# Altium PCB IMU_ATM_Module.PcbDoc
Units mm, origin at the board's own origin, x right, y up, seen from the top; angles counter-clockwise.
Board outline 30 x 25 mm, 2 copper layers (Top Layer, Bottom Layer); 41 components, 22 nets, 136 pads, 72 vias.
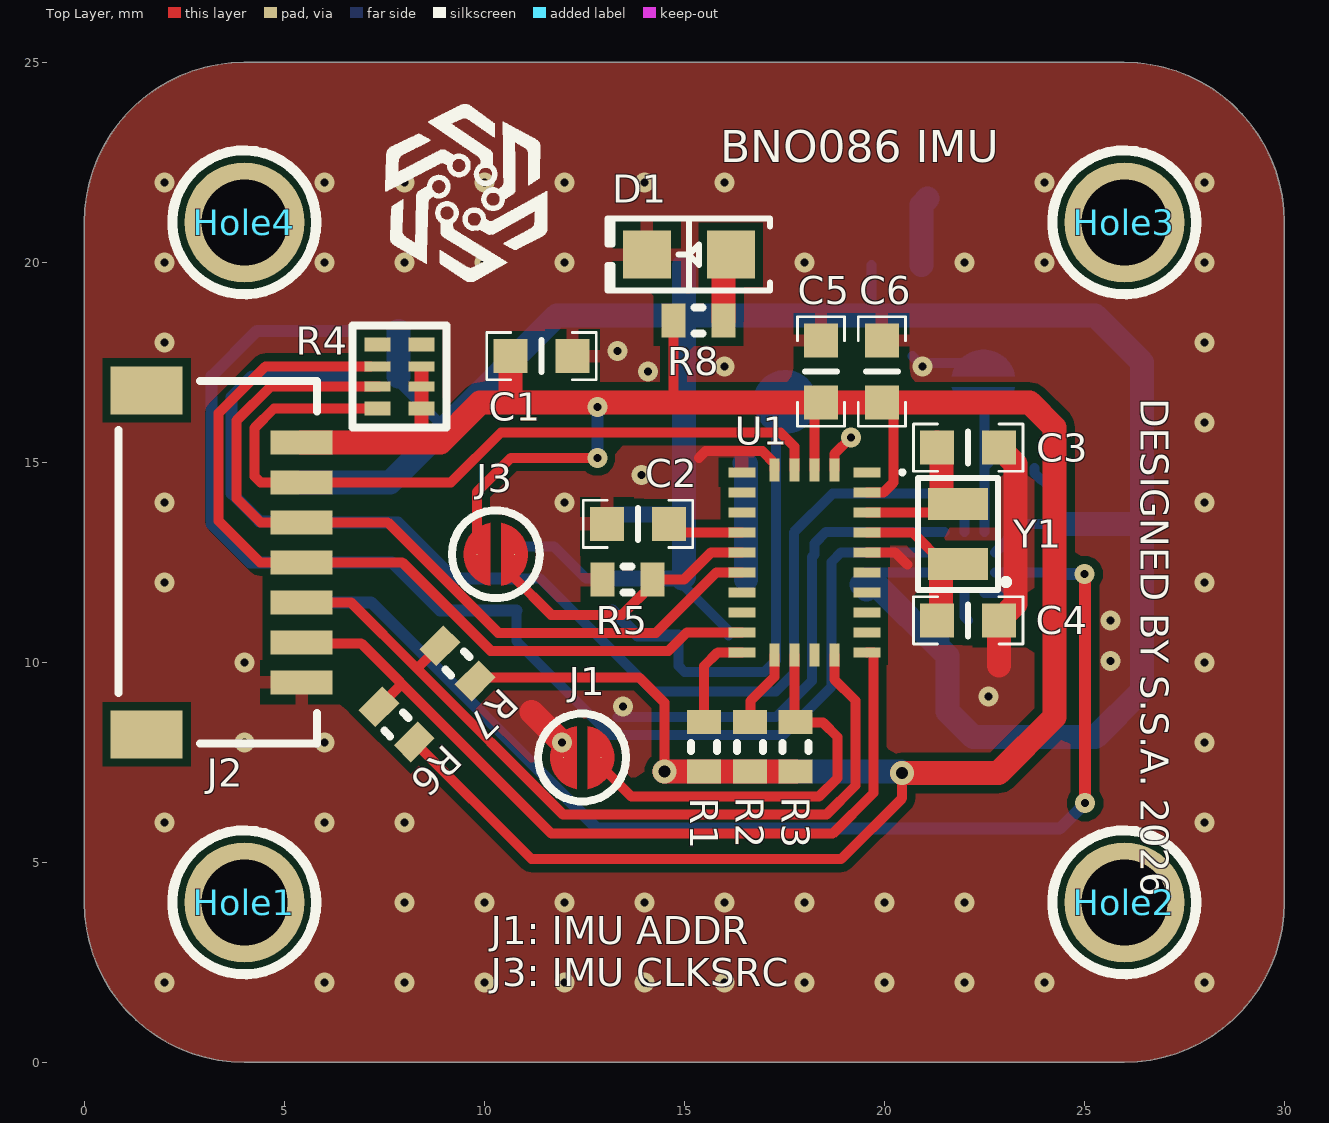
[diagram p0: Top Layer view]
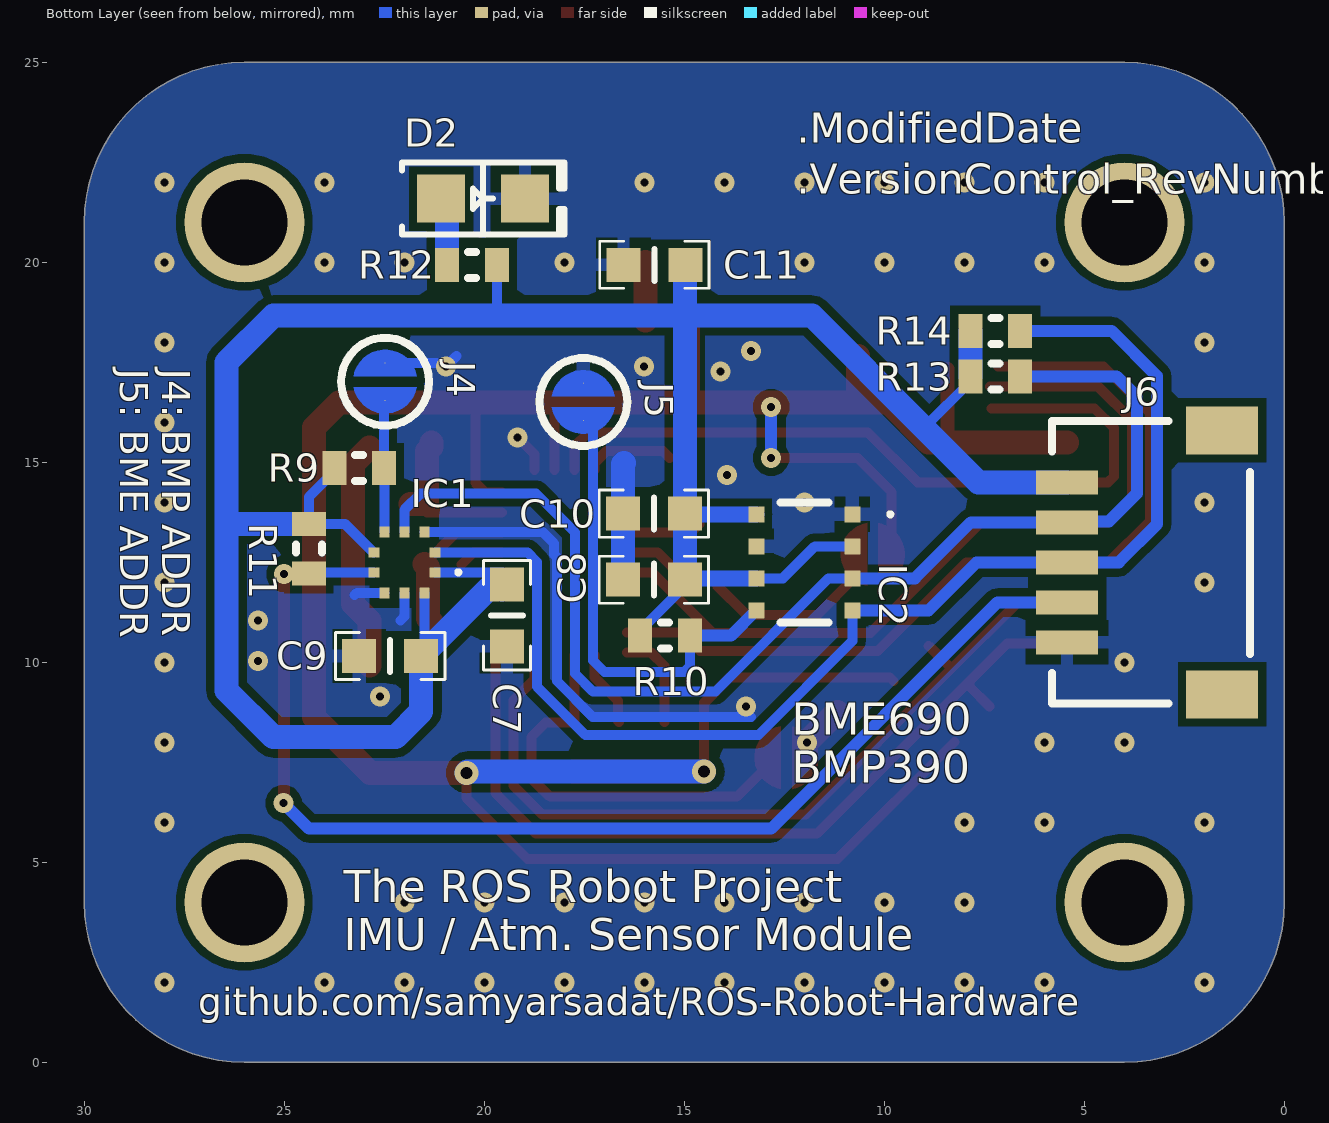
[diagram p1: Bottom Layer view, seen from below]
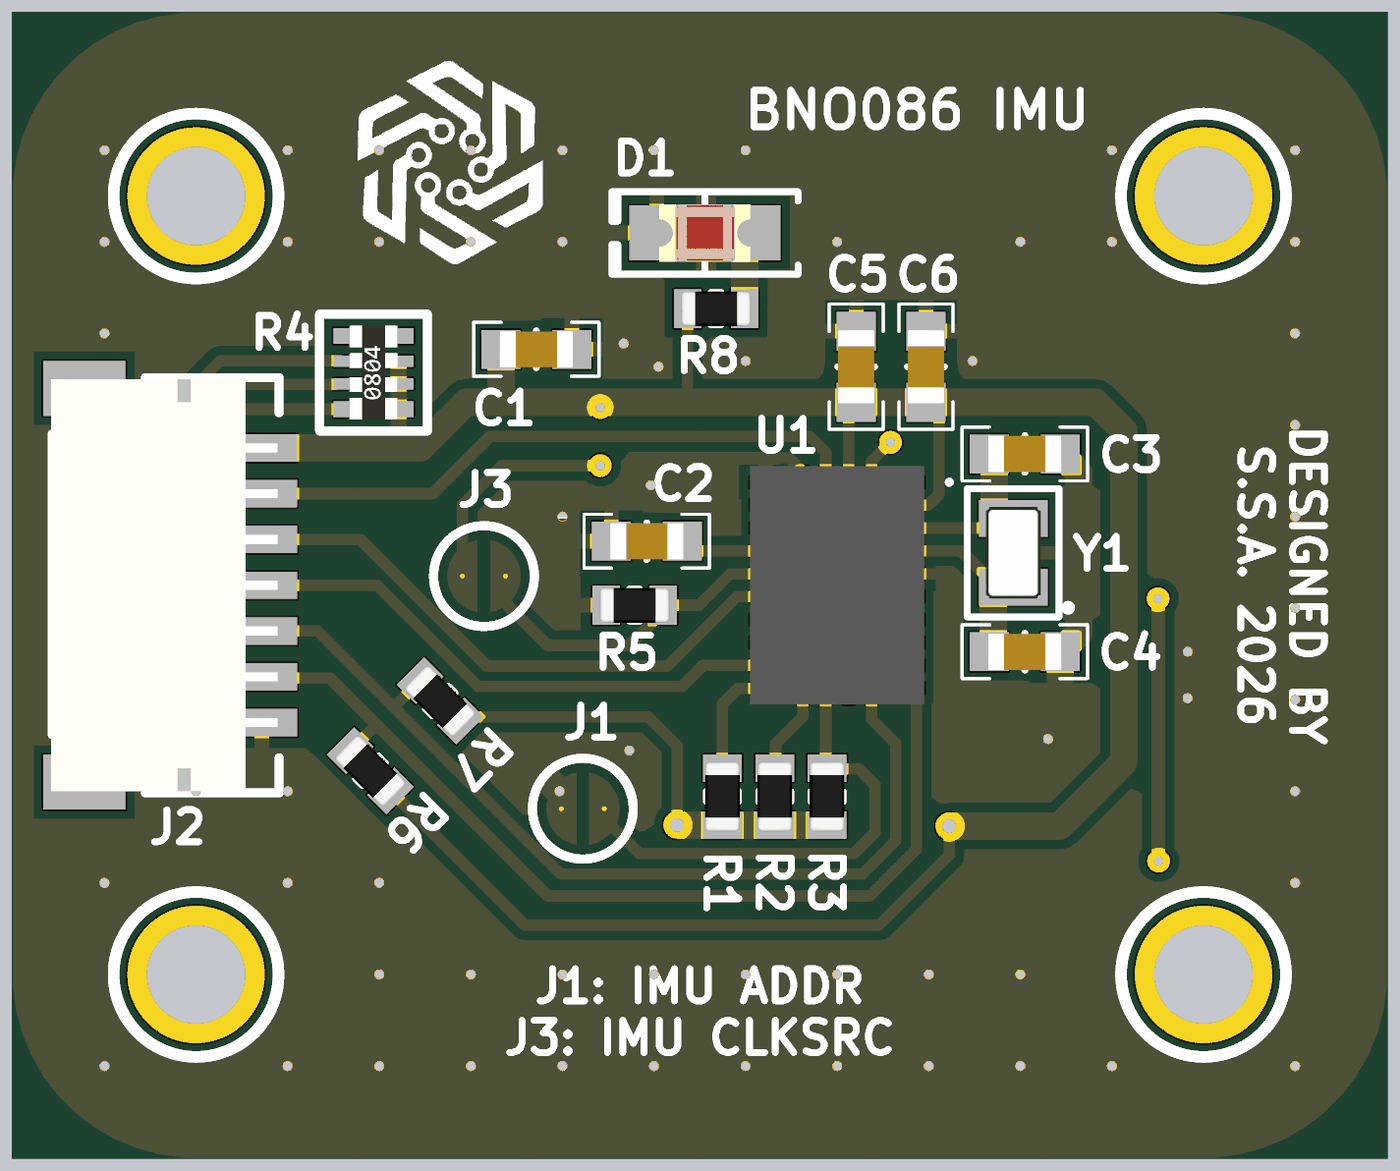
[diagram p2: 3D render of the assembled board from above, using the file's embedded part models]
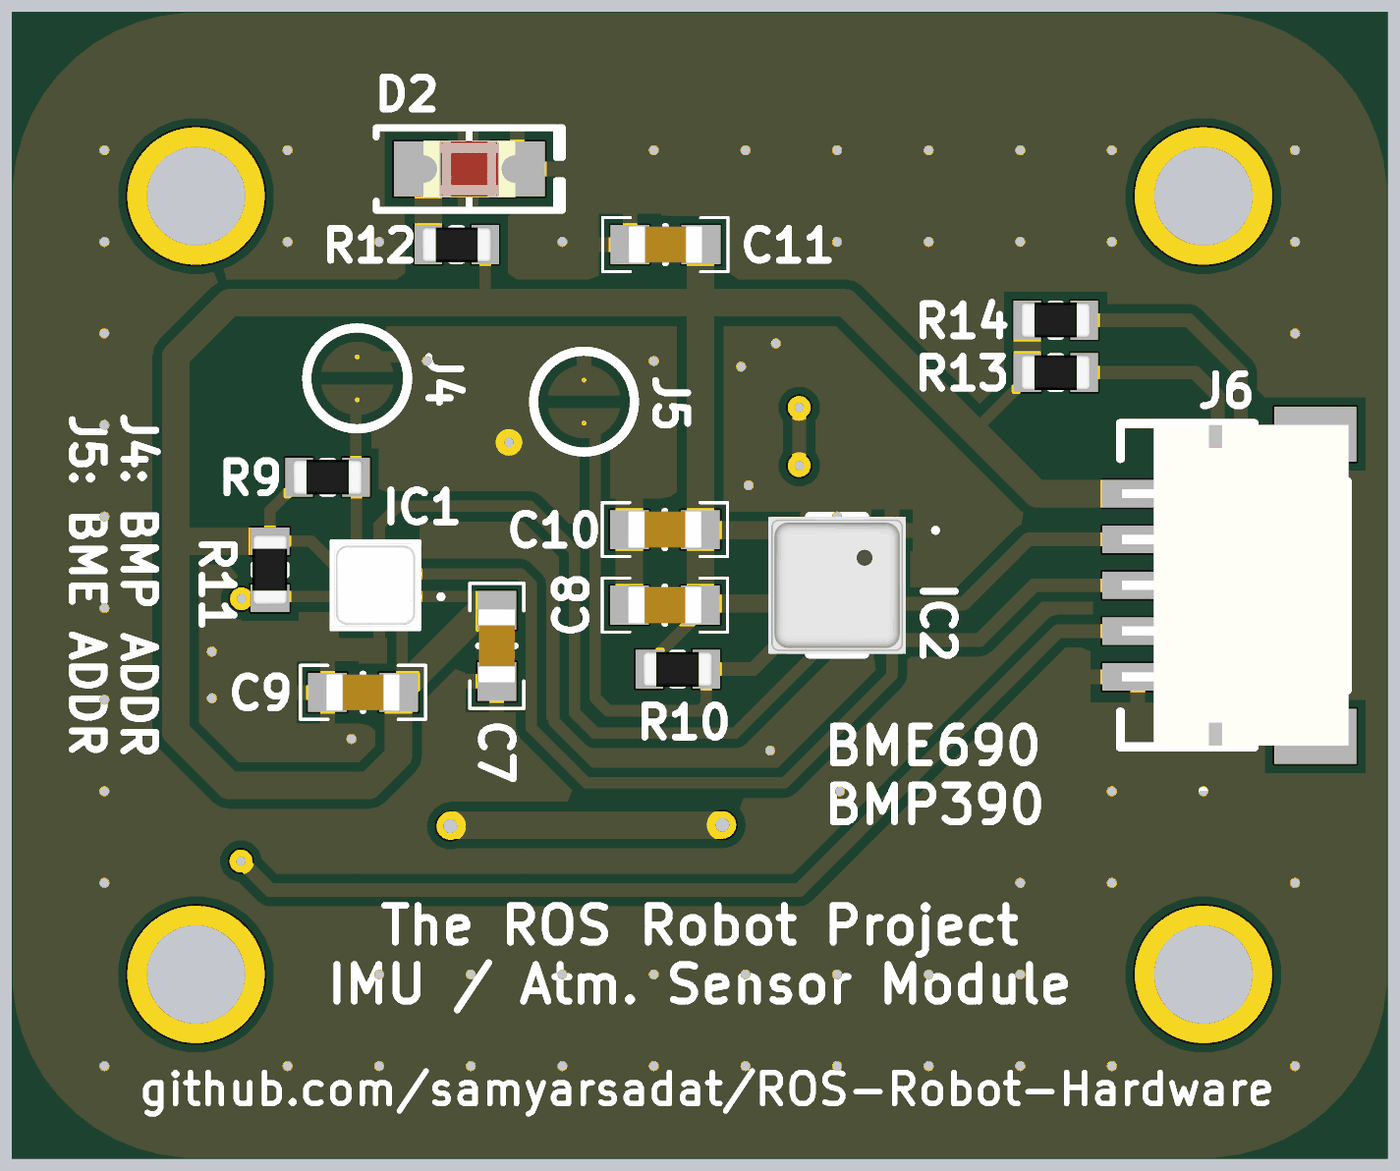
[diagram p3: 3D render of the assembled board from below, using the file's embedded part models]

## Layer stack, top to bottom
Top Solder: solder mask 0.0254, SM-002, Dk 4
Top Layer: signal copper 0.0356
Dielectric 1: dielectric 0.32, FR-4, Dk 4.8
Bottom Layer: signal copper 0.0356
Bottom Solder: solder mask 0.0254, SM-002, Dk 4

## Board outline
0,4 0,21 cw(c4,21) 4,25 26,25 cw(c26,21) 30,21 30,4 cw(c26,4) 26,0 4,0 cw(c4,4)

## Design rules (kind name [scope] priority, off if disabled: settings)
BoardOutlineClearance [All] p1: gap=0.2 ignorepadtopadclearanceinfootprint=FALSE except(0: Fill-OutlineEdge Fill-CavityEdge Fill-CutoutEdge Fill-SplitBarrior Fill-SplitContinuation Poly-OutlineEdge Poly-CavityEdge Poly-CutoutEdge Poly-SplitBarrior Poly-SplitContinuation Region-OutlineEdge Region-CavityEdge Region-CutoutEdge Region-SplitBarrior Region-SplitContinuation; 0.15: Text-OutlineEdge Text-CavityEdge Text-CutoutEdge Text-SplitBarrior Text-SplitContinuation)
Clearance "Stitching GND" [IsStitchingVia and InNet('GND') vs (IsVia and (Not IsStitchingVia)) Or IsPad] p1: gap=0.2 ignorepadtopadclearanceinfootprint=FALSE except(0.28: Arc-Hole Track-Hole)
Clearance [All] p2: gap=0.2 ignorepadtopadclearanceinfootprint=TRUE except(0.28: Arc-Hole Track-Hole)
DiffPairsRouting [All] p1: maxlimit=0.254 minlimit=0.254 mostfreqgap=0.254 toplayer_minwidth=0.381 toplayer_maxwidth=0.5 toplayer_prefwidth=0.4 bottomlayer_minwidth=0.381 bottomlayer_maxwidth=0.5 bottomlayer_prefwidth=0.4 maxuncoupledlength=12.7
HoleSize [All] p1: absolutevalues=TRUE maxlimit=6 minlimit=0.15 maxpercent=80.000 minpercent=20.000
HoleToHoleClearance [All] p1: gap=0.2 allowstackedmicrovias=TRUE
MinimumAnnularRing MinimumViaAnnularRing [IsVia] p1: minimumring=0.15
MinimumAnnularRing [All] p2: minimumring=0.2
MinimumSolderMaskSliver [Not HasCompParameter('FinePitchPads')] p1: minsoldermaskwidth=0.1
PlaneConnect [All] p1: planeconnectstyle=Relief reliefexpansion=0.508 reliefentries=4 reliefconductorwidth=0.32 reliefairgap=0.254
PolygonConnect GNDConnectBMP [Name = 'GND_L02_BMP'] p1: connectstyle=Direct reliefconductorwidth=0.254 reliefentries=4 polygonreliefangle="90 Angle" airgapwidth=0.254
PolygonConnect GNDStitchingDirect [InNet('GND')] p2: thpad.connectstyle=Relief thpad.reliefconductorwidth=0.32 thpad.reliefentries=4 thpad.polygonreliefangle="90 Angle" thpad.airgapwidth=0.254 thpad.conductorbypadedge=TRUE thpad.mindistance=0.381 thpad.enablemindistance=FALSE smdpad.connectstyle=Relief smdpad.reliefconductorwidth=0.32 smdpad.reliefentries=4 smdpad.polygonreliefangle="90 Angle" smdpad.airgapwidth=0.254 smdpad.conductorbypadedge=TRUE smdpad.mindistance=0.381 smdpad.enablemindistance=FALSE via.connectstyle=Direct via.reliefconductorwidth=0.254 via.reliefentries=4 via.polygonreliefangle="90 Angle" via.airgapwidth=0.254
PolygonConnect [All] p3: connectstyle=Relief reliefconductorwidth=0.32 reliefentries=4 polygonreliefangle="90 Angle" conductorbypadedge=TRUE mindistance=0.381 enablemindistance=FALSE airgapwidth=0.254
RoutingVias [All] p1: holewidth=0.4 width=0.8 viastyle="Through Hole" minholewidth=0.2 minwidth=0.5 maxholewidth=0.8 maxwidth=1.5
SilkToSilkClearance [All] p1: silktosilkclearance=0.1
SilkToSolderMaskClearance [IsPad] p1: minsilkscreentomaskgap=0.1 clearancetoexposedcopper=TRUE
SolderMaskExpansion [All] p1: expansion=0.04 istentingtop=FALSE
SupplyNets "Schematic Supply Nets" [InNet('+3V3_IMU')] p1: voltage=3.300
SupplyNets "Schematic Supply Nets_4" [InNet('+3V3_ATM')] p2: voltage=3.300
SupplyNets "Schematic Supply Nets_1" [InNet('GND')] p3: voltage=0.000
UnRoutedNet [All] p1: checkbadconnections=TRUE
Width [All] p1: maxlimit=1.4 minlimit=0.25 preferedwidth=0.6
22 further rules are at their usual default settings.

## Classes and differential pairs
component class Atmospheric: C7 C8 C9 C10 C11 D2 IC1 IC2 J4 J5 J6 R9 R10 R11 R12 R13 R14
component class IMU_ATM_Module: Hole1 Hole2 Hole3 Hole4
component class IMU_Mag: 232 2342 C1 C2 C3 C4 C5 C6 D1 J1 J2 J3 R1 R2 R3 R4 R5 R6 R7 R8 U1 Y1

## Components (designator, comment, footprint, x,y, rotation, side; value= is the part's Value field where it differs from the comment)
C1 "10uF" CAP_SMD_603 11.43,17.653 r180 top
C2 "100nF" CAP_SMD_603 13.843,13.462 r0 top
C3 "22pF" CAP_SMD_603 22.098,15.367 r180 top
C4 "22pF" CAP_SMD_603 22.098,11.049 r180 top
C5 "100nF" CAP_SMD_603 18.415,17.272 r270 top
C6 "100nF" CAP_SMD_603 19.939,17.272 r90 top
C7 "100nF" CAP_SMD_603 19.431,11.176 r90 bottom
C8 "100nF" CAP_SMD_603 15.761,12.065 r180 bottom
C9 "100nF" CAP_SMD_603 22.352,10.16 r0 bottom
C10 "100nF" CAP_SMD_603 15.761,13.716 r0 bottom
C11 "10uF" CAP_SMD_603 15.748,19.939 r180 bottom
D1 "LED" "LED 0805_2012 RED" 15.113,20.193 r180 top
D2 "LED" "LED 0805_2012 RED" 20.032,21.59 r180 bottom
Hole1 "Hole" Hole_2mm 4,4 r0 top locked
Hole2 "Hole" Hole_2mm 26,4 r0 top locked
Hole3 "Hole" Hole_2mm 26,21 r0 top locked
Hole4 "Hole" Hole_2mm 4,21 r0 top locked
IC1 "BMP390" BMP390 22,12.5 r270 bottom locked
IC2 "BME690" BME690 12,12.5 r180 bottom locked
J1 "Jumper Pad" "Jumper Pad" 12.446,7.62 r180 top
J2 "SM07B-SRSS-TB(LF)(SN)" "JST SM07B-SRSS-TB" 3.4,12.5 r90 top locked
J3 "Jumper Pad" "Jumper Pad" 10.287,12.7 r0 top
J4 "Jumper Pad" "Jumper Pad" 22.479,17.018 r90 bottom
J5 "Jumper Pad" "Jumper Pad" 17.526,16.51 r90 bottom
J6 "SM05B-SRSS-TB(LF)(SN)" "JST SM05B-SRSS-TB" 3.4,12.5 r270 bottom locked
R1 "2.2k" RES_0603 15.494,7.265 r90 top
R2 "2.2k" RES_0603 16.637,8.509 r270 top
R3 "10k" RES_0603 17.78,7.265 r90 top
R4 "EXB-28V103JX" "RESNET 0804-8 CONVEX" 7.874,17.145 r0 top
R5 "10k" RES_0603 12.954,12.065 r0 top
R6 "10k" RES_0603 8.246,8.01 r135 top
R7 "10k" RES_0603 9.77,9.534 r135 top
R8 "2.2k" RES_0603 14.732,18.542 r0 top
R9 "10k" RES_0603 22.505,14.859 r0 bottom
R10 "10k" RES_0603 14.859,10.668 r0 bottom
R11 "10k" RES_0603 24.384,13.462 r270 bottom
R12 "2.2k" RES_0603 19.685,19.939 r0 bottom
R13 "10k" RES_0603 7.848,17.145 r180 bottom
R14 "10k" RES_0603 7.848,18.288 r180 bottom
U1 "BNO086" BNO086 18,12.5 r0 top locked
Y1 "32.768 kHz" "MICRO CRYSTAL CM8V H0.6mm" 21.844,13.208 r90 top

## Footprints (in the part's own frame and the unit in brackets; to place one, negate y for a bottom-side part, rotate by r counter-clockwise, add the part's x,y. Pads: shape width x height; smd on the part's side, far side on the other; paste and mask are expansions set on the pad)
BME690 [mm]
  rect 0.4x0.4 smd: 1(1.2,1.2) 2(1.2,0.4) 3(1.2,-0.4) 4(1.2,-1.2) 5(-1.2,-1.2) 6(-1.2,-0.4) 7(-1.2,0.4) 8(-1.2,1.2)
  silkscreen extent -0.6,-1.5 2.2,1.5, body extent -1.5,-1.5 1.5,1.5, height 0.96
BMP390 [mm]
  rect 0.25x0.275 smd: 1(0.25,0.763) 2(-0.25,0.763) 6(-0.25,-0.763) 7(0.25,-0.763)
  rect 0.275x0.25 smd: 3(-0.762,0.5) 4(-0.762,0) 5(-0.762,-0.5) 8(0.762,-0.5) 9(0.762,0) 10(0.762,0.5)
  silkscreen extent 0.2,1.3 0.3,1.4, body extent -1,-1.08 1,0.92, height 0.73
BNO086 [mm]
  rect 0.675x0.25 smd: 1(1.562,2.25) 6(-1.562,2.25) 7(-1.562,1.75) 8(-1.562,1.25) 9(-1.562,0.75) 10(-1.562,0.25) 11(-1.562,-0.25) 12(-1.562,-0.75) 13(-1.562,-1.25) 14(-1.562,-1.75) 15(-1.562,-2.25) 20(1.562,-2.25) 21(1.562,-1.75) 22(1.562,-1.25) 23(1.562,-0.75) 24(1.563,-0.25) 25(1.563,0.25) 26(1.562,0.75) 27(1.562,1.25) 28(1.562,1.75)
  rect 0.25x0.575 smd: 2(0.75,2.312) 3(0.25,2.312) 4(-0.25,2.312) 5(-0.75,2.312) 16(-0.75,-2.313) 17(-0.25,-2.313) 18(0.25,-2.313) 19(0.75,-2.313)
  silkscreen extent 2.4,2.2 2.5,2.3, body extent -1.9,-2.6 1.9,2.6, height 1.13
CAP_SMD_603 [mm]
  rect 0.85x0.85 smd: 1(-0.775,0) 2(0.775,0)
  silkscreen extent -1.37,-0.59 1.37,0.59, body extent -0.8,-0.4 0.8,0.4, height 0.9
Hole_2mm [mm]
  round 3 hole 2.15: 1(0,0)
  silkscreen extent -1.8,-1.8 1.8,1.8
"JST SM05B-SRSS-TB" [mm] "1.0mm pitch/Disconnectable Crimp style connector"
  rect 0.6x1.55 smd: 1(-2,-2.032) 2(-1,-2.032) 3(0,-2.032) 4(1,-2.032) 5(2,-2.032)
  rect 1.2x1.8 smd: M(-3.3,1.843) M(3.3,1.843)
  silkscreen extent -3.53,-2.41 3.53,2.54, body extent -3.5,-2.38 3.5,2.57, height 2.95
"JST SM07B-SRSS-TB" [mm] "1.0mm pitch/Disconnectable Crimp style connector"
  rect 0.6x1.55 smd: 1(-3,-2.032) 2(-2,-2.032) 3(-1,-2.032) 4(0,-2.032) 5(1,-2.032) 6(2,-2.032) 7(3,-2.032)
  rect 1.2x1.8 smd: M(-4.3,1.843) M(4.3,1.843)
  silkscreen extent -4.53,-2.41 4.53,2.54, body extent -4.5,-2.38 4.5,2.57, height 2.95
"Jumper Pad" [mil]
  round 1 smd: 1(-18.48,0) 2(18.48,0)
  Top Layer region: -5.47,-31.02 -18.81,-25.26 -28.15,-14.14 -31.5,0 -28.15,14.14 -18.81,25.26 -5.47,31.02 -5.47,31.02
  Top Layer region: 5.47,-31.02 5.47,31.02 18.81,25.26 28.15,14.14 31.5,0 28.15,-14.14 18.81,-25.26 5.47,-31.02
  silkscreen extent -43,-43 43,43
"LED 0805_2012 RED" [mm] "Chip Diode, 2-Leads, Body 2.00x1.25mm, IPC Medium Density"
  rect 1.2x1.2 smd: 1(-1.05,0) 2(1.05,0)
  silkscreen extent -2.03,-0.9 2.03,0.9, body extent -1,-0.62 1,0.63, height 0.9
"MICRO CRYSTAL CM8V H0.6mm" [mm] "SMD Crystal 2.0 x 1.2 x 0.6mm"
  rect 0.8x1.5 smd: 1(-0.75,0) 2(0.75,0)
  silkscreen extent -1.4,-1.25 1.4,1, body extent -1,-0.6 1,0.6, height 0.6
RES_0603 [mm]
  rect 0.6x0.85 smd: 1(0,0) 2(1.244,0)
  silkscreen extent 0.52,-0.33 0.72,0.33, body extent -0.14,-0.38 1.38,0.38, height 0.45
"RESNET 0804-8 CONVEX" [mm] "4 resistor 2.0x1.0mm, 0.65mm high"
  rect 0.65x0.35 smd: 1(-0.55,0.8) 4(-0.55,-0.8) 5(0.55,-0.8) 8(0.55,0.8)
  rect 0.65x0.25 smd: 2(-0.55,0.25) 3(-0.55,-0.25) 6(0.55,-0.25) 7(0.55,0.25)
  silkscreen extent -1.17,-1.28 1.17,1.28, body extent -0.53,-1.02 0.53,1.03, height 0.56

## Part data
C1 C5 C6 C7 C8 C9 C10 C11: library part "Non-polar Capacitor", "Generric Ceramic Capacitor", Voltage=6.3V
C2 C3 C4: library part "Non-polar Capacitor", "Generric Ceramic Capacitor", Voltage=16V
D1 D2: "Indicator LED", Color=Red
IC1: "Integrated Circuit", Manufacturer_Name=BOSCH, Mouser Part Number=262-BMP390, Arrow Part Number=BMP390, Arrow Price/Stock=https://www.arrow.com/en/products/bmp390/bosch-sensortec?utm_currency=USD&region=nac, Datasheet Link=https://www.bosch-sensortec.com/media/boschsensortec/downloads/datasheets/bst-bmp390-ds002.pdf, Height=0.8mm, Manufacturer_Part_Number=BMP390, Mouser Price/Stock=https://www.mouser.co.uk/ProductDetail/Bosch-Sensortec/BMP390?qs=QNEnbhJQKvYQVfvRMgo2YA%3D%3D
IC2: "Integrated Circuit", Manufacturer_Name=BOSCH, Mouser Part Number=262-BME690, Arrow Part Number=BME690, Arrow Price/Stock=https://www.arrow.com/en/products/bme690/bosch-sensortec?utm_currency=USD&region=nac, Datasheet Link=https://www.bosch-sensortec.com/products/environmental-sensors/gas-sensors/bme690/#documents, Height=1mm, Manufacturer_Part_Number=BME690, Mouser Price/Stock=https://www.mouser.co.uk/ProductDetail/Bosch-Sensortec/BME690?qs=%252BXxaIXUDbq38jwlEAGDF7A%3D%3D
J2: "CONN HEADER SMD R/A 7POS 1MM", Current Rating (Amps)=0.7A, Insulation Color=Natural, Manufacturer="JST Sales America Inc.", Material Flammability Rating="UL94 V-0", Operating Temperature="-25°C ~ 85°C", Supplier Part Number 1=455-1807-1-ND, Voltage Rating=50V, ComponentLink1Description=Datasheet, ComponentLink1URL=http://www.jst-mfg.com/product/pdf/eng/eSH.pdf, ComponentLink2Description="DigiKey Link", ComponentLink2URL=http://digikey.com/product-detail/en/jst-sales-america-inc/SM07B-SRSS-TB-LF-SN/455-1807-1-ND/926878, Connector Type=Header, Contact Finish - Mating=Tin, Contact Finish - Post=Tin, Contact Material="Copper Alloy", Contact Shape=Square, Contact Type="Male Pin", Fastening Type=Push-Pull, Features="Solder Retention", Insulation Height="0.114\" (2.90mm)", Insulation Material="Polyamide (PA), Nylon", LastUpdated="1/12/2020 11:42:26 PM", Lifecycle Status=Active, Minimum Order=1, Mounting Type="Surface Mount, Right Angle", Number of Positions=7, Number of Positions Loaded=All, Number of Rows=1, Packaging=TapeAndReel, Part Number=SM07B-SRSS-TB(LF)(SN), Part Status=Active, PartId=65, Pitch - Mating="0.039\" (1.00mm)", Price=0.39, Series=SR, Shrouding="Shrouded - 4 Wall", Style="Board to Cable/Wire", Supplier 1=DigiKey, Termination=Solder
J6: "CONN HEADER SMD R/A 5POS 1MM", Current Rating (Amps)=0.7A, Insulation Color=Natural, Manufacturer="JST Sales America Inc.", Material Flammability Rating="UL94 V-0", Operating Temperature="-25°C ~ 85°C", Supplier Part Number 1=455-1805-1-ND, Voltage Rating=50V, ComponentLink1Description=Datasheet, ComponentLink1URL=http://www.jst-mfg.com/product/pdf/eng/eSH.pdf, ComponentLink2Description="DigiKey Link", ComponentLink2URL=http://digikey.com/product-detail/en/jst-sales-america-inc/SM05B-SRSS-TB-LF-SN/455-1805-1-ND/926876, Connector Type=Header, Contact Finish - Mating=Tin, Contact Finish - Post=Tin, Contact Material="Copper Alloy", Contact Shape=Square, Contact Type="Male Pin", Fastening Type=Push-Pull, Features="Solder Retention", Insulation Height="0.114\" (2.90mm)", Insulation Material="Polyamide (PA), Nylon", LastUpdated="1/12/2020 11:42:04 PM", Lifecycle Status=Active, Minimum Order=1, Mounting Type="Surface Mount, Right Angle", Number of Positions=5, Number of Positions Loaded=All, Number of Rows=1, Packaging=TapeAndReel, Part Number=SM05B-SRSS-TB(LF)(SN), Part Status=Active, PartId=63, Pitch - Mating="0.039\" (1.00mm)", Price=0.32, Series=SR, Shrouding="Shrouded - 4 Wall", Style="Board to Cable/Wire", Supplier 1=DigiKey, Termination=Solder
R1 R2 R3 R5 R6 R7 R8 R9 R10 R11 R12 R13 R14: library part Resistor, "Generic Resistor", Power=1/8W
R4: "RES ARRAY 4 RES 10K OHM 0804", Manufacturer="Panasonic Electronic Components", Number of Resistors=4, Operating Temperature="-55°C ~ 125°C", Package / Case="0804, Convex, Long Side Terminals", Power Per Element=62.5mW, Resistance (Ohms)=10k, Supplier Device Package=0804, Supplier Part Number 1=Y7103CT-ND, Temperature Coefficient=±200ppm/°C, Tolerance=±5%, Applications="Automotive AEC-Q200", Circuit Type=Isolated, ComponentLink1Description=Datasheet, ComponentLink1URL=https://industrial.panasonic.com/cdbs/www-data/pdf/AOC0000/AOC0000C14.pdf, ComponentLink2Description="DigiKey Link", ComponentLink2URL=https://www.digikey.com/en/products/detail/panasonic-electronic-components/EXB-28V103JX/256299, Height - Seated (Max)="0.018\" (0.45mm)", LastUpdated="6/3/2024 8:05:56 PM", Lifecycle Status=Active, Minimum Order=1, Mounting Type="Surface Mount", Number of Pins=8, Packaging=TapeAndReel, Part Number=EXB-28V103JX, Part Status=Active, PartId=461, Price=0.01, Series=EXB, Size / Dimension="0.079\" L x 0.039\" W (2.00mm x 1.00mm)", Supplier 1=DigiKey
U1: "9-axis IMU", Manufacturer_Name=CEVA, Mouser Part Number=526-BNO086, Datasheet Link=https://www.mouser.com/ProductDetail/CEVA/BNO086?qs=ulEaXIWI0c%2FqTo1scjodAw%3D%3D, Height=1.18mm, Manufacturer_Part_Number=BNO086, Mouser Price/Stock=https://www.mouser.co.uk/ProductDetail/CEVA/BNO086?qs=ulEaXIWI0c%2FqTo1scjodAw%3D%3D
Y1: library part CM8V-T1A-32.768KHZ-12.5PF-20PPM-TA-QC, "CRYSTAL 32.7680KHZ 12.5PF SMD", ESR (Equivalent Series Resistance)="70 kOhms", Frequency Tolerance=±20ppm, Load Capacitance=12.5pF, Manufacturer="Micro Crystal AG", Operating Mode=Fundamental, Operating Temperature="-40°C ~ 85°C", Package / Case="2-SMD, No Lead", Supplier Part Number 1=2195-CM8V-T1A-32.768KHZ-12.5PF-20PPM-TA-QCCT-ND, ComponentLink1Description=Datasheet, ComponentLink1URL=https://www.microcrystal.com/fileadmin/Media/Products/32kHz/Datasheet/CM8V-T1A.pdf, ComponentLink2Description="DigiKey Link", ComponentLink2URL=https://www.digikey.com/en/products/detail/micro-crystal-ag/CM8V-T1A-32-768KHZ-12-5PF-20PPM-TA-QC/10431068, Frequency="32.768 kHz", Height - Seated (Max)="0.024\" (0.60mm)", LastUpdated="6/3/2024 8:26:30 PM", Lifecycle Status=Active, Minimum Order=1, Mounting Type="Surface Mount", Packaging=TapeAndReel, Part Number=CM8V-T1A-32.768KHZ-12.5PF-20PPM-TA-QC, Part Status=Active, PartId=841, Price=0.28, Series=CM8V, Size / Dimension="0.079\" L x 0.047\" W (2.00mm x 1.20mm)", Supplier 1=DigiKey, Type="kHz Crystal (Tuning Fork)"

## Via types
v1: diameter 0.5, hole 0.2, Top Layer to Bottom Layer, tented both sides, 65 vias
v2: diameter 0.5, hole 0.2, Top Layer to Bottom Layer, 5 vias
v3: diameter 0.6, hole 0.3, Top Layer to Bottom Layer, 2 vias

## Nets (pads, with @x,y where several pads share a name; then routed paths per layer and width w, separated by ;. In a path a pad name is that pad's centre, name@x,y a point inside that pad or via, vN(x,y) a via of type N, cw(c..) or ccw(c..) an arc to the next point about the centre after c; other vN are vias at no path point)
+3V3_ATM: C7.2 C8.2 C9.1 C10.1 C11.2 IC1.1 IC1.6 IC1.10 IC2.2 IC2.6 IC2.8 J6.1 R9.2 R10.2 R11.1 R12.1 R13.1 R14.1 | length 70.6
  Bottom Layer w0.25: R13.1 7.848,17.02 8.993,15.875 9.017,15.875 ; IC2.2 11.738,12.9 12.538,12.1 IC2.6 ; C8.2@14.951,12.1 14.951,11.945 16.103,10.793 R10.2 ; C7.2 19.73,12.25 IC1.1 ; 19.685,18.669 R12.1 ; C9.1@21.5,10.298 IC1.10 ; IC1.6 22.775,12.75 23.487,13.462 R11.1 24.384,14.137 23.962,14.559 23.924,14.559 23.749,14.734 R9.2
  Bottom Layer w0.4: IC2.6 C8.2@14.951,12.1 ; IC2.8 C10.1@14.97,13.7
  Bottom Layer w0.6: J6.1 7.642,14.5 9.017,15.875 11.811,18.669 14.986,18.669 ; R13.1 R14.1 ; C8.2@14.951,12.1 14.986,12.135 C10.1 14.986,18.669 ; C11.2@14.986,19.926 14.986,18.669 ; C7.2 C7.2@19.556,11.826 ; C7.2@19.558,12.065 19.672,12.065 C9.1 21.577,8.776 22.225,8.128 25.273,8.128 26.442,9.297 26.442,13.462 ; R11.1 26.442,13.462 ; 14.986,18.669 19.685,18.669 25.273,18.669 26.442,17.5 26.442,13.462
+3V3_IMU: C1.2 C5.2 C6.1 J2.7 J3.1 R1.1 R2.2 R3.1 R4.5 R4.6 R4.7 R6.1 R7.1 R8.1 U1.3 U1.28 | length 77.8
  Top Layer w0.25: R6.1 11.176,5.08 18.923,5.08 20.447,6.604 v3(20.447,7.239) ; R7.1 9.858,9.622 13.873,9.622 14.504,8.991 v3(14.504,7.265) ; J3.1 9.818,14.263 10.668,15.113 v2(12.827,15.113) ; 14.541,16.497 14.732,16.688 R8.1 ; U1.3 18.25,16.332 C5.2 ; U1.28 19.984,14.25 20.225,14.49 20.225,16.211 C6.1
  Top Layer w0.35: 8.424,15.409 8.424,15.5 R4.5 R4.6 R4.7@8.424,17.335
  Top Layer w0.6: J2.7 8.424,15.5 8.901,15.5 9.898,16.497 10.668,16.497 ; C1.2 10.655,16.51 10.668,16.497 ; v3(14.504,7.265) R1.1 R2.2 R3.1 ; v3(20.447,7.239) 22.86,7.239 24.257,8.636 24.257,15.875 23.635,16.497 C6.1 C5.2 14.541,16.497 10.668,16.497
  Bottom Layer w0.3: v2(12.827,15.113) v2(12.827,16.383)
  Bottom Layer w0.6: v3(14.504,7.265) 20.421,7.265 v3(20.447,7.239)
ATM_SCL: IC1.2 IC2.4 J6.3 R14.2 | length 32
  Bottom Layer w0.25: IC2.4 10.8,10.535 13.149,8.186 17.475,8.186 18.681,9.392 18.681,12.511 18.92,12.75 IC1.2
  Bottom Layer w0.3: R14.2 4.318,18.288 3.183,17.153 3.183,13.454 4.137,12.5 J6.3 7.693,12.5 8.893,11.3 IC2.4
ATM_SDA: IC1.4 IC2.3 J6.2 R13.2 | length 30.8
  Bottom Layer w0.25: IC2.3 11.395,12.1 14.224,9.271 17.287,9.271 17.736,9.72 17.736,13.252 18.708,14.224 21.59,14.224 22,13.814 IC1.4
  Bottom Layer w0.3: R13.2 4.191,17.145 3.683,16.637 3.683,14.224 4.383,13.524 5.408,13.524 J6.2 7.836,13.5 9.236,12.1 IC2.3
BARO_INT: IC1.7 J6.4 R11.2 | length 30.2
  Top Layer w0.3: v2(25.007,12.205) 25.013,12.199 25.013,6.483 v2(25.019,6.477)
  Bottom Layer w0.25: IC1.7 R11.2@24.453,12.25
  Bottom Layer w0.3: J6.4 7.169,11.5 12.827,5.842 24.384,5.842 v2(25.019,6.477) ; R11.2@24.453,12.25 24.498,12.205 24.505,12.211 25.001,12.211 v2(25.007,12.205)
GND: C1.1 C2.1 C3.1 C4.1 C5.1 C6.2 C7.1 C8.1 C9.2 C10.2 C11.1 D1.2 D2.2 IC1.3 IC1.8 IC1.9 IC2.1 IC2.7 J1.2 J2.1 J4.2 J5.2 J6.5 R5.1 U1.2 U1.5 U1.6 U1.25 | length 29.5
  Top Layer w0.25: 15.367,15.113 15.531,15.277 16.952,15.277 17.25,14.979 U1.5 ; U1.2 18.75,15.205 v2(19.166,15.621) ; U1.25 20.27,12.75 20.574,12.446
  Top Layer w0.6: 11.176,8.763 v1(11.938,8.001) ; 22.873,9.919 C4.1 23.281,11.457 23.281,14.959 C3.1
  Bottom Layer w0.25: 13.335,8.636 17.289,8.636 18.186,9.533 18.186,12.628 18.258,12.7 18.258,12.976 18.544,13.262 IC1.3 ; 20.701,17.653 20.867,17.487 J4.2 ; IC1.9 22,11.147 22.098,11.049 ; IC1.8 23.187,11.738 23.241,11.684
  Bottom Layer w0.6: 16.51,14.986 16.536,14.96 C10.2 C8.1
  other v1: 2,2 6,2 8,2 10,2 12,2 14,2 16,2 18,2 20,2 22,2 24,2 28,2 8,4 10,4 12,4 14,4 16,4 18,4 20,4 22,4 2,6 6,6 8,6 28,6 4,8 6,8 28,8 13.462,8.89 22.606,9.144 4,10 28,10 25.654,10.033 25.654,11.049 2,12 28,12 2,14 12,14 28,14 13.932,14.682 28,16 14.097,17.272 16.002,17.399 20.955,17.399 13.335,17.78 2,18 28,18 2,20 6,20 8,20 10,20 12,20 18,20 22,20 24,20 28,20 2,22 6,22 8,22 10,22 12,22 14,22 16,22 24,22 28,22
IMU_BOOT: J2.6 R4.4 U1.4 | length 19.1
  Top Layer w0.25: J2.6 4.407,14.5 4.26,14.646 4.26,15.863 4.742,16.345 R4.4 ; J2.6@5.588,14.5 9.166,14.5 10.414,15.748 17.399,15.748 17.75,15.397 U1.4
IMU_INT: J2.4 R4.2 U1.14 | length 21.6
  Top Layer w0.25: R4.2@7.159,17.399 4.524,17.399 3.36,16.235 3.36,13.531 4.391,12.5 J2.4 7.947,12.5 10.16,10.287 14.605,10.287 15.068,10.75 U1.14
IMU_RST: J2.5 R4.3 U1.11 | length 20.5
  Top Layer w0.25: R4.3@7.363,16.895 7.051,16.895 7.047,16.891 4.652,16.891 3.81,16.049 3.81,14.097 4.407,13.5 7.583,13.5 10.346,10.737 14.294,10.737 15.807,12.25 U1.11
IMU_SCL: J2.3 R7.2 U1.19 | length 20.6
  Top Layer w0.25: J2.3 6.661,11.5 8.319,9.842 ; R7.2 8.319,9.842 ; U1.19 18.75,9.571 19.276,9.045 19.276,6.917 18.549,6.19 11.971,6.19 8.319,9.842
IMU_SDA: J2.2 R6.2 U1.20 | length 21.2
  Top Layer w0.25: J2.2 5.457,10.475 6.922,10.475 7.873,9.524 ; R6.2 7.873,9.397 7.873,9.524 ; U1.20 19.727,10.25 19.727,6.731 18.71,5.715 11.683,5.715 7.937,9.461 7.873,9.524
NetC2_2: C2.2 U1.9 | length 1.9
  Top Layer w0.25: C2.2 14.83,13.25 U1.9
NetC3_2: C3.2 U1.27 Y1.2 | length 3.8
  Top Layer w0.25: U1.27 Y1.2@21.428,13.75
  Top Layer w0.6: C3.2@21.323,15.494 21.323,15.389 21.428,15.283 21.428,14.024 21.494,13.958 Y1.2
NetC4_2: C4.2 U1.26 Y1.1 | length 3.8
  Top Layer w0.25: U1.26 20.702,13.25 Y1.1@21.494,12.458
  Top Layer w0.6: C4.2@21.323,11.011 21.342,11.03 21.412,11.101 21.412,12.376 Y1.1@21.494,12.458
NetD1_1: D1.1 R8.2 | length 1.5
  Top Layer w0.6: R8.2 D1.1@15.976,20.006
NetD2_1: D2.1 R12.2 | length 1.7
  Bottom Layer w0.6: R12.2 20.929,21.437 D2.1
NetIC1_5: IC1.5 J4.1 R9.1 | length 3.5
  Bottom Layer w0.25: J4.1 22.505,16.523 R9.1 ; IC1.5 22.5,14.88 R9.1@22.606,14.986
NetIC2_5: IC2.5 J5.1 R10.1 | length 11.1
  Bottom Layer w0.25: R10.1 14.859,9.906 15.005,9.76 16.999,9.76 17.286,10.047 17.286,15.811 17.311,15.836
  Bottom Layer w0.3: IC2.5 13.832,10.668 R10.1
NetJ1_1: J1.1 R3.2 U1.17 | length 10.6
  Top Layer w0.25: J1.1 12.915,7.405 13.68,6.64 18.362,6.64 18.826,7.103 18.826,8.135 18.471,8.49 17.799,8.49 17.75,8.539 U1.17
NetJ3_2: J3.2 R5.2 U1.10 | length 7.6
  Top Layer w0.25: 10.718,12.954 10.718,12.142 11.673,11.187 13.445,11.187 14.199,11.941 R5.2 14.987,12.066 15.671,12.75 U1.10
NetR1_2: R1.2 U1.15 | length 2.5
  Top Layer w0.25: R1.2 15.494,9.906 15.838,10.25 U1.15
NetR2_1: R2.1 U1.16 | length 1.9
  Top Layer w0.25: R2.1 16.658,8.53 16.658,9.038 17.25,9.63 U1.16
pads on no net: Hole1.1 Hole2.1 Hole3.1 Hole4.1 J2.M J6.M R4.1 R4.8 U1.1 U1.7 U1.8 U1.12 U1.13 U1.18 U1.21 U1.22 U1.23 U1.24

## Polygon pours and split planes (outlines as drawn)
GND on Bottom Layer "GND_L02_P001" (solid, remove dead copper, pour order 1): 0,4 0,21 cw(c4,21) 4,25 26,25 cw(c26,21) 30,21 30,4 cw(c26,4) 26,0 4,0 cw(c4,4)
GND on Top Layer "GND_L01_P000" (solid, remove dead copper, pour order 0): 0,4 0,21 cw(c4,21) 4,25 26,25 cw(c26,21) 30,21 30,4 cw(c26,4) 26,0 4,0 cw(c4,4)

## Silkscreen, mask and mechanical layers (free items; w line width, h text height)
Top Overlay:
  drawing of 6 lines, arcs and shapes, not listed
  text "BNO086 IMU" at 15.898,22.502 h0.8
  text "DESIGNED BY S.S.A. 2026" at 26.416,16.603 h0.7 r270
  text "J1: IMU ADDR / J3: IMU CLKSRC" at 10.158,1.9 h0.7
Bottom Overlay:
  text ".ModifiedDate" at 12.192,22.987 h0.75
  text ".VersionControl_RevNumberShort" at 12.192,21.713 h0.75
  text "J4: BMP ADDR / J5: BME ADDR" at 29.1,17.342 h0.7 r90
  text "BME690 / BMP390" at 12.319,6.985 h0.8
  text "The ROS Robot Project / IMU / Atm. Sensor Module" at 23.509,2.8 h0.8
  text "github.com/samyarsadat/ROS-Robot-Hardware" at 27.156,1.173 h0.68
Mechanical 1:
  the board outline again, w0.254